# Altium PCB PWM_Controller.PcbDoc
Units mil, origin at the board's own origin, x right, y up, seen from the top; angles counter-clockwise.
Board outline 3475 x 3100 mil, 2 copper layers (Top Layer, Bottom Layer); 119 components, 77 nets, 390 pads, 78 vias.
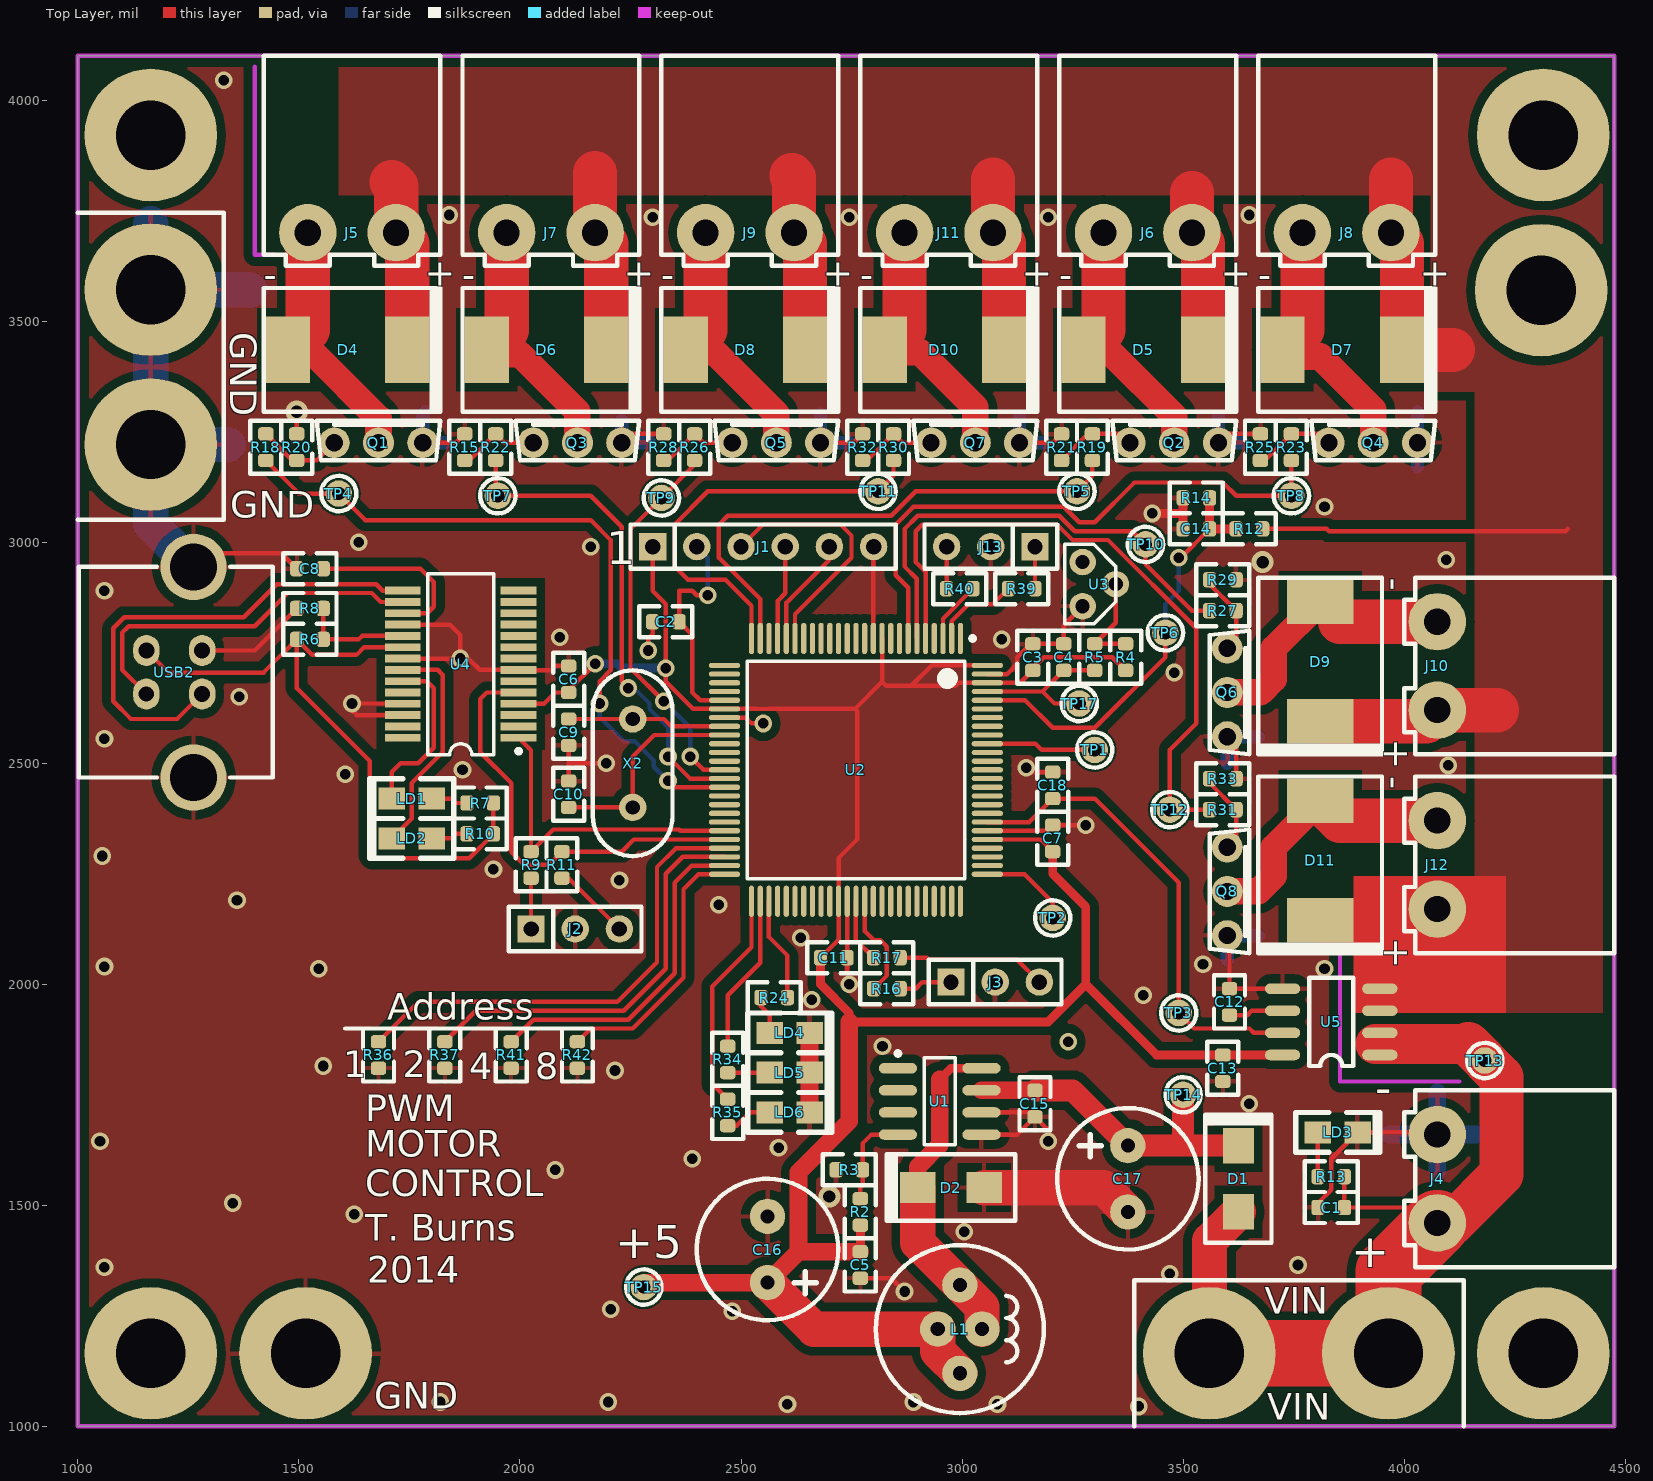
[diagram p0: Top Layer view]
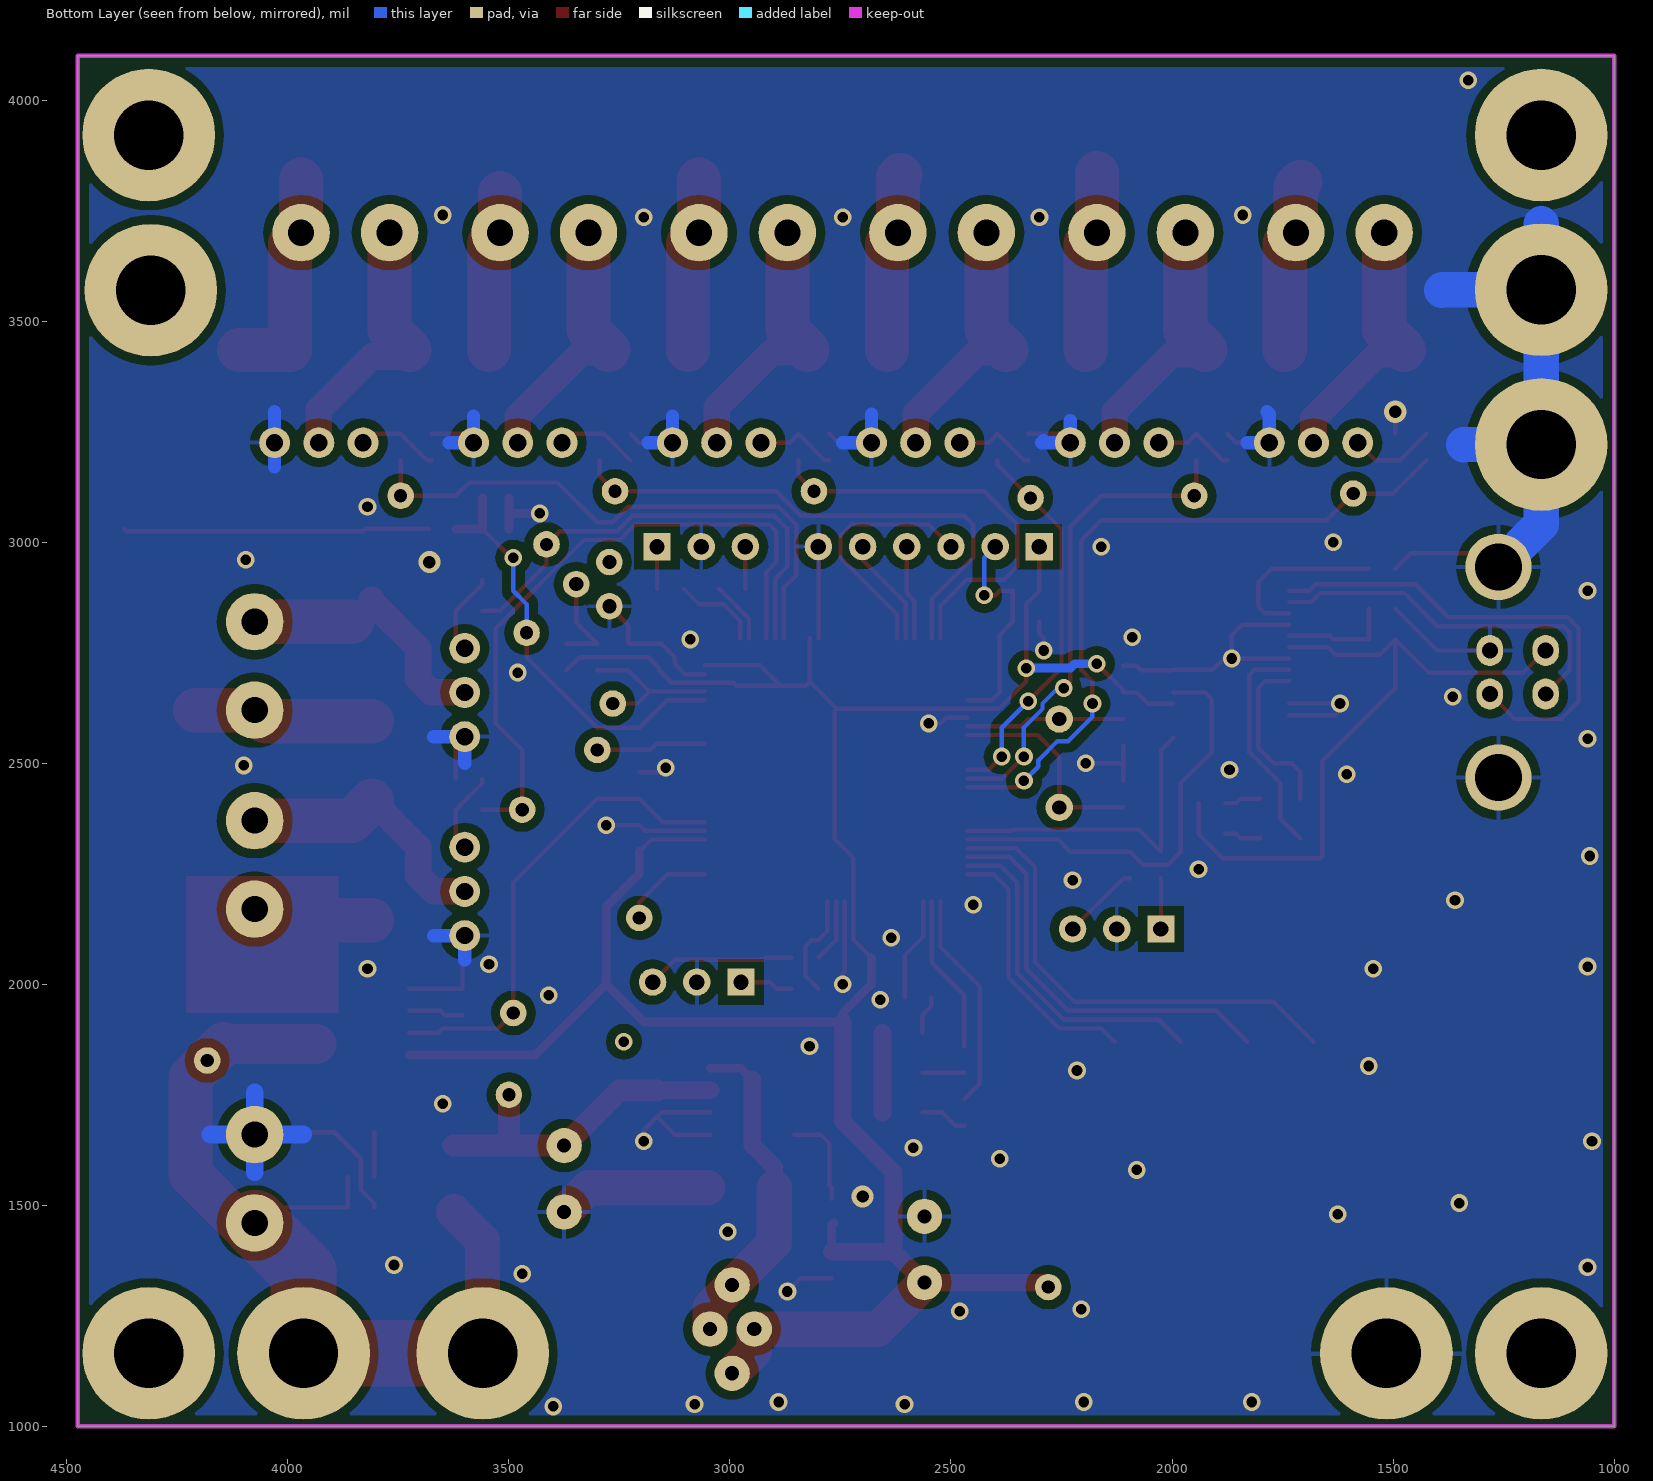
[diagram p1: Bottom Layer view, seen from below]

## Layer stack, top to bottom
Top Layer: signal copper 1.4
Dielectric: dielectric 12.6, FR-4, Dk 4.8
Bottom Layer: signal copper 1.4

## Board outline
1000,1000 1000,4100 4475,4100 4475,1000

## Design rules (kind name [scope] priority, off if disabled: settings)
Clearance Clearance_poly [InPoly] p1: gap=20
Clearance [All] p2: gap=7
ComponentClearance [All] p1 off: gap=10 collisioncheckmode=3 verticalgap=10 showdistances=FALSE
HoleSize [All] p1: absolutevalues=TRUE maxlimit=400 minlimit=24 maxpercent=80.000 minpercent=20.000
MinimumAnnularRing [All] p1: minimumring=8
PlaneClearance [All] p1: clearance=12
PolygonConnect PolygonConnect_via [IsVia] p1: connectstyle=Direct reliefconductorwidth=10 reliefentries=4 polygonreliefangle="90 Angle"
PolygonConnect [All] p2: connectstyle=Relief reliefconductorwidth=10 reliefentries=4 polygonreliefangle="90 Angle"
RoutingVias [All] p1: holewidth=24 width=40 viastyle="Through Hole" minholewidth=24 minwidth=35 maxholewidth=28 maxwidth=50
SolderMaskExpansion [All] p1: expansion=4
TestPointUsage [All] p1: valid=0 allowmultiple=FALSE
Testpoint [(IsPad And (OnTopLayer Or OnBottomLayer))] p1: side=3 testpointundercomponent=TRUE minsize=40 maxsize=100 preferedsize=60 minholesize=0 maxholesize=40 preferedholesize=32 testpointgrid=1 style=297 order=0123456789
Width [All] p1: maxlimit=300 minlimit=10 preferedwidth=10
16 further rules are at their usual default settings.

## Components (designator, comment, footprint, x,y, rotation, side; value= is the part's Value field where it differs from the comment)
C1 "100n" 0603 3805,1495 r0 top
C2 "100n" 0603 2300,2820 r0 top
C3 "100n" 0603 3160,2770 r270 top
C4 "100n" 0603 3230,2770 r270 top
C5 "100n" 0603 2770,1395 r270 top
C6 "100n" 0603 2110,2720 r270 top
C7 "100n" 0603 3205,2360 r270 top
C8 "100n" 0603 1495,2940 r0 top
C9 "22p" 0603 2110,2600 r270 top
C10 "22p" 0603 2110,2400 r90 top
C11 "100n" 0603 2740,2060 r180 top
C12 "100n" 0603 3605,1990 r270 top
C13 "100n" 0603 3590,1780 r90 top
C14 "100n" 0603 3500,3030 r0 top
C15 "100n" 0603 3165,1700 r90 top
C16 "220u 25V" RB.15/.32 2560,1325 r180 top
C17 "220u 25V" RB.15/.32 3375,1635 r0 top
C18 "100n" 0603 3205,2480 r270 top
D1 "SS14" DO-214AC 3625,1560 r270 top
D2 "SS14" DO-214AC 2975,1540 r0 top
D4 "SK54C" SMC 1610,3435 r180 top
D5 "SK54C" SMC 3410,3435 r180 top
D6 "SK54C" SMC 2060,3435 r180 top
D7 "SK54C" SMC 3860,3435 r180 top
D8 "SK54C" SMC 2510,3435 r180 top
D9 "SK54C" SMC 3810,2730 r90 top
D10 "SK54C" SMC 2960,3435 r180 top
D11 "SK54C" SMC 3810,2280 r90 top
J1 "Pins 6" SIP6 2300,2990 r0 top
J2 "PINS3" SIP3 2025,2125 r0 top
J3 "PINS3" SIP3 2975,2005 r0 top
J4 "Dinkle Horizontal Socket" WEID2R 4075,1460 r90 top
J5 "Dinkle Horizontal Socket" WEID2R 1720,3700 r180 top
J6 "Dinkle Horizontal Socket" WEID2R 3520,3700 r180 top
J7 "Dinkle Horizontal Socket" WEID2R 2170,3700 r180 top
J8 "Dinkle Horizontal Socket" WEID2R 3970,3700 r180 top
J9 "Dinkle Horizontal Socket" WEID2R 2620,3700 r180 top
J10 "Dinkle Horizontal Socket" WEID2R 4075,2620 r90 top
J11 "Dinkle Horizontal Socket" WEID2R 3070,3700 r180 top
J12 "Dinkle Horizontal Socket" WEID2R 4075,2170 r90 top
J13 "PINS3" SIP3 3165,2990 r180 top
L1 "100uH" INDUCTOR6B 2995,1220 r0 top
LD1 "RED" 0805DIODE 1710,2420 r0 top
LD2 "YEL" 0805DIODE 1710,2330 r0 top
LD3 "RED" 0805DIODE 3895,1665 r180 top
LD4 "RED" 0805DIODE 2655,1890 r180 top
LD5 "RED" 0805DIODE 2655,1800 r180 top
LD6 "RED" 0805DIODE 2655,1710 r180 top
Q1 "IRLU024NPBF" TO-251 1780,3225 r0 top
Q2 "IRLU024NPBF" TO-251 3580,3225 r0 top
Q3 "IRLU024NPBF" TO-251 2230,3225 r0 top
Q4 "IRLU024NPBF" TO-251 4030,3225 r0 top
Q5 "IRLU024NPBF" TO-251 2680,3225 r0 top
Q6 "IRLU024NPBF" TO-251 3600,2560 r270 top
Q7 "IRLU024NPBF" TO-251 3130,3225 r0 top
Q8 "IRLU024NPBF" TO-251 3600,2110 r270 top
R2 "4k7" 0603 2770,1455 r90 top
R3 "1k5" 0603 2775,1580 r180 top
R4 "1k8" 0603 3370,2710 r90 top
R5 "10k" 0603 3300,2770 r270 top
R6 "4k7" 0603 1495,2780 r0 top
R7 "330R" 0603 1940,2410 r180 top
R8 "10k" 0603 1495,2850 r0 top
R9 "330R" 0603 2025,2240 r90 top
R10 "330R" 0603 1940,2340 r180 top
R11 "330R" 0603 2095,2240 r90 top
R12 "3k" 0603 3620,3030 r0 top
R13 "1k8" 0603 3865,1565 r180 top
R14 "1k" 0603 3560,3100 r180 top
R15 "10k" 0603 1875,3245 r270 top
R16 "330R" 0603 2800,1990 r0 top
R17 "330R" 0603 2800,2060 r0 top
R18 "1k" 0603 1425,3185 r90 top
R19 "1k" 0603 3295,3185 r90 top
R20 "10k" 0603 1495,3245 r270 top
R21 "10k" 0603 3225,3245 r270 top
R22 "1k" 0603 1945,3185 r90 top
R23 "1k" 0603 3745,3185 r90 top
R24 "330R" 0603 2605,1970 r180 top
R25 "10k" 0603 3675,3245 r270 top
R26 "1k" 0603 2395,3185 r90 top
R27 "1k" 0603 3560,2845 r0 top
R28 "10k" 0603 2325,3245 r270 top
R29 "10k" 0603 3620,2915 r180 top
R30 "1k" 0603 2845,3185 r90 top
R31 "1k" 0603 3560,2395 r0 top
R32 "10k" 0603 2775,3245 r270 top
R33 "10k" 0603 3620,2465 r180 top
R34 "330R" 0603 2470,1860 r270 top
R35 "330R" 0603 2470,1740 r270 top
R36 "10k" 0603 1680,1810 r90 top
R37 "10k" 0603 1830,1810 r90 top
R39 "330R" 0603 3165,2895 r180 top
R40 "330R" 0603 2965,2895 r0 top
R41 "10k" 0603 1980,1810 r90 top
R42 "10k" 0603 2130,1810 r90 top
TP1 "TEST POINT" "TEST POINT" 3300,2530 r0 top
TP2 "TEST POINT" "TEST POINT" 3205,2150 r0 top
TP3 "TEST POINT" "TEST POINT" 3490,1935 r0 top
TP4 "TEST POINT" "TEST POINT" 1590,3110 r0 top
TP5 "TEST POINT" "TEST POINT" 3260,3115 r0 top
TP6 "TEST POINT" "TEST POINT" 3460,2795 r0 top
TP7 "TEST POINT" "TEST POINT" 1950,3105 r0 top
TP8 "TEST POINT" "TEST POINT" 3745,3105 r0 top
TP9 "TEST POINT" "TEST POINT" 2320,3100 r0 top
TP10 "TEST POINT" "TEST POINT" 3415,2995 r90 top
TP11 "TEST POINT" "TEST POINT" 2810,3115 r90 top
TP12 "TEST POINT" "TEST POINT" 3470,2395 r90 top
TP13 "TEST POINT" "TEST POINT" 4182.5,1827.5 r90 top
TP14 "TEST POINT" "TEST POINT" 3500,1750 r90 top
TP15 "TEST POINT" "TEST POINT" 2280,1315 r90 top
TP17 "TEST POINT" "TEST POINT" 3265,2635 r90 top
U1 "LM2594M-ADJ" M08A_N 2855,1810 r0 top
U2 "ATMEGA2560-16AU" 100T1_N 2760,2485 r270 top
U3 "LM335Z" TO-92_LM335 3272.71,2855 r90 top
U4 "FT232R" ssop28 1865.91,2723.98 r90 top
U5 "Current Sensor" so-8 3945,1840 r180 top
USB2 "USB-B" USB_BV 1155,2755 r90 top
X2 "14.7456MHz" XTAL-V2 2255,2400 r90 top

## Footprints (in the part's own frame and the unit in brackets; to place one, negate y for a bottom-side part, rotate by r counter-clockwise, add the part's x,y. Pads: shape width x height; smd on the part's side, far side on the other; paste and mask are expansions set on the pad)
100T1_N [mm] "100-Pin Thin Quad Flat Pack 0.5 mm Pitch, IPC Medium Density"
  oval 1.8x0.3 smd: 1(-7.55,6) 2(-7.55,5.5) 3(-7.55,5) 4(-7.55,4.5) 5(-7.55,4) 6(-7.55,3.5) 7(-7.55,3) 8(-7.55,2.5) 9(-7.55,2) 10(-7.55,1.5) 11(-7.55,1) 12(-7.55,0.5) 13(-7.55,0) 14(-7.55,-0.5) 15(-7.55,-1) 16(-7.55,-1.5) 17(-7.55,-2) 18(-7.55,-2.5) 19(-7.55,-3) 20(-7.55,-3.5) 21(-7.55,-4) 22(-7.55,-4.5) 23(-7.55,-5) 24(-7.55,-5.5) 25(-7.55,-6) 51(7.55,-6) 52(7.55,-5.5) 53(7.55,-5) 54(7.55,-4.5) 55(7.55,-4) 56(7.55,-3.5) 57(7.55,-3) 58(7.55,-2.5) 59(7.55,-2) 60(7.55,-1.5) 61(7.55,-1) 62(7.55,-0.5) 63(7.55,0) 64(7.55,0.5) 65(7.55,1) 66(7.55,1.5) 67(7.55,2) 68(7.55,2.5) 69(7.55,3) 70(7.55,3.5) 71(7.55,4) 72(7.55,4.5) 73(7.55,5) 74(7.55,5.5) 75(7.55,6)
  oval 0.3x1.8 smd: 26(-6,-7.55) 27(-5.5,-7.55) 28(-5,-7.55) 29(-4.5,-7.55) 30(-4,-7.55) 31(-3.5,-7.55) 32(-3,-7.55) 33(-2.5,-7.55) 34(-2,-7.55) 35(-1.5,-7.55) 36(-1,-7.55) 37(-0.5,-7.55) 38(0,-7.55) 39(0.5,-7.55) 40(1,-7.55) 41(1.5,-7.55) 42(2,-7.55) 43(2.5,-7.55) 44(3,-7.55) 45(3.5,-7.55) 46(4,-7.55) 47(4.5,-7.55) 48(5,-7.55) 49(5.5,-7.55) 50(6,-7.55) 76(6,7.55) 77(5.5,7.55) 78(5,7.55) 79(4.5,7.55) 80(4,7.55) 81(3.5,7.55) 82(3,7.55) 83(2.5,7.55) 84(2,7.55) 85(1.5,7.55) 86(1,7.55) 87(0.5,7.55) 88(0,7.55) 89(-0.5,7.55) 90(-1,7.55) 91(-1.5,7.55) 92(-2,7.55) 93(-2.5,7.55) 94(-3,7.55) 95(-3.5,7.55) 96(-4,7.55) 97(-4.5,7.55) 98(-5,7.55) 99(-5.5,7.55) 100(-6,7.55)
  silkscreen extent -7.67,-6.25 6.25,6.83, body extent -7,-7 7,7, height 1.05
0603 [mil]
  rrect50% 30x35 smd: 1(0,0) 2(60,0)
  silkscreen extent -30,-35 90,35
0805DIODE [mil]
  rect 60x50 smd: A(90,0) K(0,0)
  silkscreen extent -50,-45 140,45
DO-214AC [mil]
  rect 80x70 smd: A(75,0) K(-75,0)
  silkscreen extent -145,-75 145,75
INDUCTOR6B [mil] "380mil dia"
  round 80 hole 32: 1(0,100) 1(50,0) 2(-50,0) 2(0,-100)
  silkscreen extent -190,-190 190,190
M08A_N [mm]
  oval 2.2x0.6 smd: 1(0,0) 2(0,-1.27) 3(0,-2.54) 4(0,-3.81) 5(4.8,-3.81) 6(4.8,-2.54) 7(4.8,-1.27) 8(4.8,0)
  silkscreen extent -0.12,-4.41 3.3,0.97, body extent 0.45,-4.36 4.35,0.54, height 1.76
RB.15/.32 [mil]
  round 80 hole 32: 1(0,0) 2(0,-150)
  silkscreen extent -160,-235 160,85
SIP3 [mil]
  rect 62x62 hole 35: 1(0,0)
  round 62 hole 35: 2(100,0) 3(200,0)
  silkscreen extent -50,-50 250,50
SIP6 [mil]
  rect 62x62 hole 35: 1(0,0)
  round 62 hole 35: 2(100,0) 3(200,0) 4(300,0) 5(400,0) 6(500,0)
  silkscreen extent -50,-50 550,50
SMC [mil]
  rect 100x150 smd: A(135,0) K(-135,0)
  silkscreen extent -210,-140 190,140
so-8 [mil]
  oval 80x24 smd: 1(0,0) 2(0,-50) 3(0,-100) 4(0,-150) 5(220,-150) 6(220,-100) 7(220,-50) 8(220,0)
  silkscreen extent 60,-175 160,25
ssop28 [mm] "SSOP; 28 Leads; Body Width 5.3 mm; Pitch 0.65 mm"
  rect 0.45x2.05 smd: 1(-4.225,-3.325) 2(-3.575,-3.325) 3(-2.925,-3.325) 4(-2.275,-3.325) 5(-1.625,-3.325) 6(-0.975,-3.325) 7(-0.325,-3.325) 8(0.325,-3.325) 9(0.975,-3.325) 10(1.625,-3.325) 11(2.275,-3.325) 12(2.925,-3.325) 13(3.575,-3.325) 14(4.225,-3.325) 15(4.225,3.325) 16(3.575,3.325) 17(2.925,3.325) 18(2.275,3.325) 19(1.625,3.325) 20(0.975,3.325) 21(0.325,3.325) 22(-0.325,3.325) 23(-0.975,3.325) 24(-1.625,3.325) 25(-2.275,3.325) 26(-2.925,3.325) 27(-3.575,3.325) 28(-4.225,3.325)
  silkscreen extent -5.2,-3.45 5.2,1.9
"TEST POINT" [mil]
  round 60 hole 30: 1(0,0)
  silkscreen extent -40,-40 40,40
TO-92_LM335 [mil]
  round 60 hole 32: +(50,-75) -(0,0) ADJ(100,0)
  silkscreen extent -40,-75 140,40
TO-251 [mil]
  round 70 hole 39: D(-100,0) G(-200,0) S(0,0)
  silkscreen extent -240,-40 40,50
USB_BV [mm] "USB Type B vertical"
  round 3.81 hole 2.71: 0(-7.3,-2.71) 0(4.8,-2.71)
  oval 1.778x1.524 hole 0.92: 1(0,0) 3(-2.5,-3.2) 4(0,-3.2)
  oval 1.778x1.524 hole 0.889: 2(-2.5,0)
  silkscreen extent -7.3,-7.26 4.82,3.89
WEID2R [mil]
  round 130 hole 59: 1(0,0) 2(200,0)
  silkscreen extent -100,-400 300,75
XTAL-V2 [mil]
  round 62 hole 32: 1(0,0) 2(200,0)
  silkscreen extent -110,-90 310,90

## Part data
C1 C3 C4 C6 C7 C8 C9 C10 C11 C12 C13 C14 C15 C18: library part CAP
C2 C5: library part cap
C16 C17: library part "CAPACITOR POL-S"
D1 D2: library part "DIODE SCHOTTKY-S", "SCHOTTKY , 1A, 40V"
D4 D5 D6 D7 D8 D9 D10 D11: library part "DIODE SCHOTTKY"
J1: library part CON6
J2 J3 J13: library part CON3
J4 J5 J6 J7 J8 J9 J10 J11 J12: library part CON2
L1: library part INDUCTOR6
LD1 LD2 LD3 LD4 LD5 LD6: library part LED
Q1 Q2 Q3 Q4 Q5 Q6 Q7 Q8: library part MOSFET-N1DSML, "N Channel MOSFET"
R2 R3: library part RES-AX0.3
R4 R5 R6 R7 R8 R10 R12 R13 R14 R15 R22 R23 R24 R25 R26 R27 R28 R29 R30 R31 R32 R33 R34 R35 R36 R37 R41 R42: library part RES8
R9 R11 R16 R17 R39 R40: library part res8
R18 R19 R20 R21: library part RES8, "1% Resistor"
TP1 TP2 TP3 TP4 TP5 TP6 TP7 TP8 TP9 TP10 TP11 TP12 TP13 TP14 TP15 TP17: "Probe compatible test point"
U1: library part LM2594, "SMPS 0.5A"
U2: library part ATMEGA2560(TQFP100)
U5: library part ACS714, "+/- XA Current Sensor"
X2: library part CRYSTAL

## Free pads (board coordinates)
  round 300 hole 157 paste+0: ""(1165,1165) ""(1165,3220.91) ""(1165,3570.91) ""(1165,3920.91) ""(1515,1165) ""(3559.61,1165) ""(3964.61,1165) ""(4310,3570) ""(4314.61,1165) ""(4314.61,3920.91)

## Via types
v1: diameter 40, hole 24, Top Layer to Bottom Layer, tented both sides, 75 vias
v2: diameter 50, hole 28, Top Layer to Bottom Layer, 3 vias

## Nets (pads, with @x,y where several pads share a name; then routed paths per layer and width w, separated by ;. In a path a pad name is that pad's centre, name@x,y a point inside that pad or via, vN(x,y) a via of type N, cw(c..) or ccw(c..) an arc to the next point about the centre after c; other vN are vias at no path point)
12V: C1.2 D1.A J4.1 pad.@3559.61,1165 pad.@3964.61,1165 R13.1 TP13.1 U5.1 U5.2 | length 2113.9
  Top Layer w10: R13.1 C1.2 4040,1495 J4.1
  Top Layer w80: pad.@3559.61,1165 3559.61,1419.61 D1.A ; J4.1 J4.1@4110,1460
  Top Layer w90: 3935,1865 4145,1865
  Top Layer w100: J4.1@4110,1460 4220,1570 4220,1790 4145,1865
  Top Layer w150: pad.@3559.61,1165 3964.61,1165 3964.61,1349.61 J4.1
+5: C3.2 C5.1 C6.2 C7.2 C11.2 C13.2 C16.1 J1.1 L1.2 R2.1 R4.1 TP15.1 U2.10 U2.31 U2.61 U2.80 U2.98 U2.100 U4.4 U5.8 | length 6171.6
  Top Layer w10: U4.4 2054.41,2634.41 2080,2660 C6.2 2110,2665 v1(2170,2725) ; J1.1 2300,2890 2330,2860 v1(2330,2715) 2330,2685 2392.2,2622.8 U2.31 2757.8,2622.8 ; C11.2 2720.63,2100.63 U2.61 2720.63,2285.63 2762.52,2327.52 2762.52,2618.07 2757.8,2622.8 ; U2.10 2819.06,2684.06 ; U2.80 3177.48,2327.52 C7.2 ; U2.100 2931.22,2721.22 2885,2675 ; R4.1 3340,2740 3185,2740 3160,2715 C3.2 3131.85,2681.85 U2.98 2991.85,2681.85 2985,2675 2885,2675 ; 2757.8,2622.8 2819.06,2684.06 ; 2819.06,2684.06 2828.11,2675 2885,2675
  Top Layer w20: C11.2 2680,2000 2745,1935 2745,1915 3195,1915 3280,2000 ; R2.1@2765,1460 R2.1 C5.1 ; C7.2 3205,2250 3280,2175 3280,2000 ; U5.8 C13.2 3440,1840 3280,2000
  Top Layer w40: TP15.1 2290,1325 C16.1 2630,1395 ; 2745,1915 2745,1690 2630,1575 2630,1395 ; C5.1 2630,1395
  Top Layer w80: C16.1 2665,1220 2945,1220 2945,1170 L1.2@2995,1120
  Bottom Layer w20: v1(2170,2725) 2220,2725 2230,2715 v1(2330,2715)
ADDR_0: R36.2 U2.47 | length 1090.1
  Top Layer w10: R36.2 1770,1960 2220,1960 2310,2050 2310,2265 2352.83,2307.83 U2.47
ADDR_1: R37.2 U2.48 | length 931.9
  Top Layer w10: R37.2 1900,1940 2235,1940 2330,2035 2330,2250 2368.15,2288.15 U2.48
ADDR_2: R41.2 U2.49 | length 767.9
  Top Layer w10: R41.2 2030,1920 2245,1920 2350,2025 2350,2230 2388.46,2268.46 U2.49
ADDR_3: R42.2 U2.50 | length 606.8
  Top Layer w10: R42.2 2160,1900 2255,1900 2370,2015 2370,2215 2403.78,2248.78 U2.50
CS0: U2.19
GND: C1.1 C2.1 C3.1 C4.1 C5.2 C6.1 C7.1 C8.1 C9.2 C10.2 C11.1 C12.1 C13.1 C14.1 C15.1 C16.2 C17.2 C18.1 D2.A J1.6 J2.2 J3.2 J4.2 J13.2 LD3.K LD4.K LD5.K LD6.K pad.@1165,3220.91 pad.@1165,3570.91 pad.@1515,1165 Q1.S Q2.S Q3.S Q4.S Q5.S Q6.S Q7.S Q8.S R3.2 R8.1 R14.2 R15.1 R20.1 R21.1 R25.1 R28.1 R29.1 R32.1 R33.1 R36.1 R37.1 R41.1 R42.1 U1.5 U1.6 U2.11 U2.32 U2.62 U2.81 U2.99 U3.- U4.7 U4.18 U4.21 U4.25 U4.26 U5.5 USB2.0 USB2.4 | length 7699.2
  Top Layer w10: USB2.0@1261.69,2943.98 1292.72,2975 1460,2975 C8.1 ; USB2.4 1400,2755 R8.1 ; R20.1 v2(1495,3295) ; U4.26 1631.18,2608.82 1620,2620 v1(1620,2635) 1734.41,2635 U4.25 ; U4.21 v1(1865,2736.77) ; U4.18 1841.46,2813.54 1865,2790 v1(1865,2736.77) ; Q1.S 1855,3225 R15.1 ; C10.2 2110,2500 ; C9.2 2110,2500 ; C6.1 2080,2720 2070,2710 1997.99,2710 U4.7 1908.82,2711.18 1883.23,2736.77 v1(1865,2736.77) ; J2.2 J2.2@2130,2125 ; v1(2195,2500) 2110,2500 ; Q3.S 2250,3245 R28.1 ; v1(2290,2755) 2290,2782.5 2300,2792.5 C2.1 ; U2.32 2510.83,2603.11 2523.94,2590 v1(2550,2590) ; Q5.S 2755,3225 R32.1 ; U2.62 2740,2187.44 C11.1 2740,2030 2745,2025 v1(2745,2000) ; C5.2 2840,1335 v1(2870,1305) ; U2.11 2799.37,2989.37 J1.6 ; U1.5 3125,1660 C15.1 ; U1.6 3155,1710 C15.1 ; U2.81 3192.2,2347.2 C7.1 v1(3280,2360) ; U2.99 3101.54,2701.54 3125,2725 3125,2740 3155,2770 C3.1 C4.1 3230,2812.29 U3.- ; Q7.S 3205,3225 R21.1 ; v1@3140,2490 v1(3145,2490) 3155,2480 C18.1 ; v1(3195,1645) 3195,1670 C15.1 ; Q2.S 3600,3245 R25.1 ; Q8.S 3605,2105 C12.1 U5.5 ; Q6.S 3620,2540 R33.1 ; C1.1 3805,1505 3835,1535 3835,1605 LD3.K 4070,1665 J4.2
  Top Layer w20: v1(3430,3065) 3500,3065 ; C14.1 3500,3065 ; R14.2 3500,3065
  Top Layer w40: LD6.K LD5.K LD4.K
  Top Layer w80: D2.A 3320,1540 C17.2
  Bottom Layer w10: 2230,3275 2230,3285
  Bottom Layer w30: 1785,3295 1780,3290 Q1.S 1830,3225 ; 2230,3275 Q3.S 2295,3225 2290,3230 ; 2680,3290 Q5.S 2745,3225 ; 3130,3285 Q7.S 3185,3225 ; 3580,3285 Q2.S 3635,3225 ; 3600,2055 Q8.S 3670,2110 ; 3600,2500 Q6.S 3670,2560 ; 4030,3170 Q4.S 4030,3295
  Bottom Layer w40: 3965,1660 J4.2 ; 4075,1575 J4.2 ; 4075,1755 J4.2 ; 4175,1660 J4.2
  Bottom Layer w80: pad.@1165,3720 pad.@1165,3570.91 ; USB2.0@1261.69,2943.98 1165,3040.67 pad.@1165,3220.91 ; 1340,3220 1339.09,3220.91 pad.@1165,3220.91 ; 1390,3570 1389.09,3570.91 pad.@1165,3570.91 ; pad.@1165,3220.91 pad.@1165,3570.91
  other v1: 3400,1045 2605,1050 3080,1050 1820,1055 2200,1055 2890,1055 2480,1260 2205,1265 3470,1345 1060,1360 3760,1365 3005,1440 1625,1480 1350,1505 2080,1580 2390,1605 2585,1630 1050,1645 3650,1730 2215,1805 1555,1815 2820,1860 2660,1965 3410,1975 1545,2035 3820,2035 1060,2040 3545,2045 2635,2105 2450,2180 1360,2190 2225,2235 1940,2260 1055,2290 1605,2475 1870,2485 4100,2495 1060,2555 1365,2650 3480,2705 3090,2780 2090,2785 1060,2890 4095,2960 2160,2990 1635,3000 3820,3080 2300,3735 2745,3735 3195,3735 1840,3740 3650,3740 1330,4045
  other v2: 2700,1520 3680,2955
MISO: J1.4 U2.22 | length 214.9
  Top Layer w10: U2.22 2582.83,2867.17 2600,2884.33 J1.4
MOSI: J1.5 U2.21 | length 248.1
  Top Layer w10: U2.21 2602.52,2862.52 2700,2960 J1.5
MOTORCURRENT: C18.2 TP3.1 U2.82 U5.7 | length 1082.1
  Top Layer w10: U2.82 3151.89,2366.89 C18.2 3300,2420 3490,2230 TP3.1 3525,1900 3650,1900 3660,1890 U5.7
MOTORRAIL: D4.K D5.K D6.K D7.K D8.K D9.K D10.K D11.K J5.1 J6.1 J7.1 J8.1 J9.1 J10.1 J11.1 J12.1 R12.2 U5.3 U5.4 | length 3827.8
  Top Layer w10: R12.2 3825,3030 3830,3025 4365,3025 4370,3030
  Top Layer w100: 1710,3815 1720,3805 J5.1 1745,3675 D4.K ; 2170,3835 J7.1 2195,3675 D6.K ; 2615,3830 2620,3825 J9.1 2645,3675 D8.K ; 3070,3820 J11.1 3095,3675 D10.K ; 3520,3790 J6.1 3545,3675 D5.K ; D11.K J12.1@4050,2145 ; D9.K 4050,2595 J10.1 4210,2620 ; 3970,3820 J8.1 3995,3675 D7.K 4110,3435
MOTORRAIL_ADC: C14.2 R12.1 R14.1 TP6.1 U2.96 | length 959.3
  Top Layer w10: U2.96 3142.52,2642.48 3205,2580 3300,2580 3460,2740 TP6.1 ; v1(3490,2965) 3495,2965 C14.2
  Top Layer w20: R14.1 C14.2 R12.1
  Bottom Layer w10: TP6.1 3460,2860 3490,2890 v1(3490,2965)
NetC8_2: C8.2 U4.17 | length 394.6
  Top Layer w10: C8.2 1775,2940 1805,2910 1805,2853.9 1790.24,2839.13 U4.17
NetC9_1: C9.1 U2.33 X2.2 | length 359.6
  Top Layer w10: C9.1 X2.2 2325,2600 2341.57,2583.43 U2.33
NetC10_1: C10.1 U2.34 X2.1 | length 487.9
  Top Layer w10: C10.1 X2.1 2255,2515 2303.74,2563.74 U2.34
NetC12_2: C12.2 U5.6 | length 124.1
  Top Layer w10: C12.2 3645,1930 3655,1940 U5.6
NetC15_2: C15.2 C17.1 D1.K TP14.1 U1.7 | length 747.8
  Top Layer w40: U1.7 C15.2
  Top Layer w50: C15.2 3250,1760 C17.1 3500,1635 ; TP14.1 3500,1635 ; D1.K 3500,1635
NetD2_K: D2.K L1.1 U1.8 | length 750.1
  Top Layer w20: 2949.91,1784.91 2975,1810 U1.8
  Top Layer w40: D2.K 2900,1586.66 2949.91,1636.57 2949.91,1784.91
  Top Layer w80: D2.K 2900,1415 2995,1320 3045,1270 L1.1@3045,1220
NetD4_A: D4.A J5.2 Q1.D | length 622.8
  Top Layer w60: D4.A@1475,3425 D4.A@1485,3425 ; D4.A D4.A@1485,3425 ; D4.A@1485,3425 1535,3425 1680,3280 Q1.D@1680,3230 ; Q1.D@1680,3230 Q1.D Q1.D@1680,3230
  Top Layer w100: D4.A 1520,3480 J5.2
NetD5_A: D5.A J6.2 Q2.D | length 620.8
  Top Layer w60: D5.A@3275,3430 D5.A@3280,3430 ; D5.A D5.A@3280,3430 ; D5.A@3280,3430 3335,3430 3480,3285 Q2.D@3480,3230 ; Q2.D@3480,3230 Q2.D Q2.D@3480,3230
  Top Layer w100: D5.A 3320,3480 J6.2
NetD6_A: D6.A J7.2 Q3.D | length 631.6
  Top Layer w60: D6.A@1925,3425 D6.A@1935,3425 ; D6.A D6.A@1935,3425 ; D6.A@1935,3425 2000,3425 2130,3295 Q3.D@2130,3230 ; Q3.D@2130,3230 Q3.D Q3.D@2130,3230
  Top Layer w100: D6.A 1970,3480 J7.2
NetD7_A: D7.A J8.2 Q4.D | length 639.6
  Top Layer w60: D7.A@3725,3420 D7.A@3740,3420 ; D7.A D7.A@3740,3420 ; D7.A@3740,3420 3810,3420 3930,3300 Q4.D@3930,3230 ; Q4.D@3930,3230 Q4.D Q4.D@3930,3230
  Top Layer w100: D7.A 3770,3480 J8.2
NetD8_A: D8.A J9.2 Q5.D | length 623.7
  Top Layer w60: D8.A@2375,3430 D8.A@2380,3430 ; D8.A D8.A@2380,3430 ; D8.A@2380,3430 2440,3430 2580,3290 Q5.D@2580,3230 ; Q5.D@2580,3230 Q5.D Q5.D@2580,3230
  Top Layer w100: D8.A 2420,3480 J9.2
NetD9_A: D9.A J10.2 Q6.D | length 565.9
  Top Layer w60: D9.A@3810,2870 D9.A 3705,2760 3705,2690 3675,2660 Q6.D@3605,2660 ; Q6.D@3605,2660 Q6.D Q6.D@3605,2660
  Top Layer w100: D9.A@3855,2820 J10.2
NetD10_A: D10.A J11.2 Q7.D | length 627.5
  Top Layer w60: D10.A@2825,3425 2830,3430 2905,3430 3030,3305 Q7.D@3030,3230 ; Q7.D@3030,3230 Q7.D Q7.D@3030,3230
  Top Layer w100: D10.A 2870,3480 J11.2
NetD11_A: D11.A J12.2 Q8.D | length 621.6
  Top Layer w60: D11.A 3705,2310 3705,2245 3670,2210 Q8.D@3605,2210 ; Q8.D@3605,2210 Q8.D Q8.D@3605,2210
  Top Layer w100: D11.A 3855,2370 J12.2
NetJ2_1: J2.1 R9.1 | length 115
  Top Layer w10: J2.1 R9.1
NetJ2_3: J2.3 R11.1 | length 177.6
  Top Layer w10: R11.1 2110,2240 J2.3
NetJ3_1: J3.1 R16.2 | length 121.2
  Top Layer w10: R16.2 2895,1990 2910,2005 J3.1
NetJ3_3: J3.3 R17.2 | length 337.8
  Top Layer w10: R17.2 2920,2060 2925,2055 3125,2055 J3.3
NetJ13_1: J13.1 R39.1 | length 95
  Top Layer w10: R39.1 J13.1
NetJ13_3: J13.3 R40.1 | length 95
  Top Layer w10: R40.1 J13.3
NetLD1_A: LD1.A R7.2 | length 84.1
  Top Layer w10: LD1.A 1845,2420 1855,2410 R7.2
NetLD2_A: LD2.A R10.2 | length 84.1
  Top Layer w10: LD2.A 1845,2330 1855,2340 R10.2
NetLD3_A: LD3.A R13.2 | length 100
  Top Layer w10: R13.2 LD3.A
NetLD4_A: LD4.A R24.2 | length 88.3
  Top Layer w10: R24.2 2545,1950 2565,1930 LD4.A
NetLD5_A: LD5.A R34.2 | length 95
  Top Layer w10: R34.2 LD5.A
NetLD6_A: LD6.A R35.2 | length 107.4
  Top Layer w10: R35.2 2490,1680 2520,1710 LD6.A
NetQ1_G: Q1.G R18.2 R20.2 | length 196.4
  Top Layer w10: R18.2 1485,3185 R20.2 1540,3185 Q1.G
NetQ2_G: Q2.G R19.2 R21.2 | length 188.1
  Top Layer w10: R21.2 3285,3245 R19.2 3360,3245 Q2.G
NetQ3_G: Q3.G R15.2 R22.2 | length 188.1
  Top Layer w10: R15.2 1885,3185 R22.2 1965,3225 Q3.G
NetQ4_G: Q4.G R23.2 R25.2 | length 188.1
  Top Layer w10: R25.2 3685,3185 R23.2 3810,3245 Q4.G
NetQ5_G: Q5.G R26.2 R28.2 | length 188.1
  Top Layer w10: R28.2 2335,3185 R26.2 2415,3225 Q5.G
NetQ6_G: Q6.G R27.2 R29.2 | length 188.1
  Top Layer w10: R29.2 3560,2905 R27.2 3620,2780 Q6.G
NetQ7_G: Q7.G R30.2 R32.2 | length 188.1
  Top Layer w10: R32.2 2785,3185 R30.2 2865,3225 Q7.G
NetQ8_G: Q8.G R31.2 R33.2 | length 188.1
  Top Layer w10: R33.2 3560,2455 R31.2 3620,2330 Q8.G
NetR2_2: R2.2 R3.1 U1.4 | length 215.4
  Top Layer w10: R2.2 2770,1540 2775,1545 R3.1 2775,1640 2795,1660 U1.4
NetR4_2: R4.2 R5.1 U3.+ | length 224.8
  Top Layer w10: U3.+ 3347.71,2817.71 R5.1 R4.2
NetR6_2: R6.2 R8.2 U4.19 | length 253.3
  Top Layer w10: R8.2 R6.2 1635,2780 1642.95,2787.95 U4.19
NetR24_1: R24.1 U2.53 | length 235.1
  Top Layer w10: U2.53 2563.15,2106.85 2605,2065 R24.1
NetR34_1: R34.1 U2.52 | length 358.2
  Top Layer w10: R34.1 2470,1975 2543.46,2048.46 U2.52
NetR35_1: R35.1 U2.51 | length 499
  Top Layer w10: R35.1 2435,1775 2435,1995 2523.78,2083.78 U2.51
PWM_1: R18.1 TP4.1 U2.40 | length 1622
  Top Layer w10: R18.1 1500,3110 TP4.1 1650,3050 2160,3050 2205,3005 2205,2710 2180,2685 v1(2180,2635) ; v1(2335,2460) 2349.37,2445.63 U2.40
  Bottom Layer w10: v1(2180,2635) 2180,2605 2235,2550 2259.23,2550 2302.85,2506.39 2302.85,2492.15 v1(2335,2460)
PWM_2: R22.1 TP7.1 U2.39 | length 1110.5
  Top Layer w10: R22.1 1945,3110 TP7.1 2160,3105 2230,3035 2230,2685 v1(2245,2670) ; v1(2335,2515) 2384.68,2465.32 U2.39
  Bottom Layer w10: v1(2245,2670) 2258,2670 2293,2635 2293,2622.81 2335,2580.81 v1(2335,2515)
PWM_3: R26.1 TP9.1 U2.38 | length 869.1
  Top Layer w10: v1(2325,2640) 2250,2715 2250,3030 TP9.1 2395,3175 R26.1 ; v1@2390,2510 2415,2485 U2.38
  Bottom Layer w10: v1(2325,2640) 2385,2580 v1(2385,2515)
PWM_4: R30.1 TP11.1 U2.25 | length 955.1
  Top Layer w10: U2.25 2523.78,2856.22 2465,2915 2380,2915 2350,2945 2350,3040 2425,3115 TP11.1 2845,3150 R30.1
PWM_5: R19.1 TP5.1 U2.24 | length 1222
  Top Layer w10: U2.24 2543.46,2871.54 2450,2965 2450,3040 2470,3060 2840,3060 2895,3115 TP5.1 3295,3150 R19.1
PWM_6: R23.1 TP8.1 U2.7 | length 1325.2
  Top Layer w10: U2.7 2878.11,2896.89 2850,2925 2850,3040 2890,3080 3230,3080 3265,3045 3300,3045 3390,3135 3590,3135 3620,3105 TP8.1 R23.1
PWM_7: R27.1 TP10.1 U2.6 | length 1077.1
  Top Layer w10: U2.6 2897.8,2917.2 2870,2945 2870,3030 2900,3060 3220,3060 3255,3025 3385,3025 TP10.1 3415,2950 3520,2845 R27.1
PWM_8: R31.1 TP12.1 U2.5 | length 1515.5
  Top Layer w10: U2.5 2917.48,2932.52 2895,2955 2895,3025 2910,3040 3215,3040 3250,3005 3330,3005 3530,2805 3530,2590 3470,2530 TP12.1 R31.1
RESET*: C2.2 J1.2 U2.30 | length 511.9
  Top Layer w10: v1(2425,2880) 2400,2880 2390,2890 2360,2890 C2.2 2390,2790 2390,2660 2407.52,2642.48 U2.30
  Bottom Layer w10: J1.2 2425,2965 v1(2425,2880)
RXD0: R39.2 U2.2 | length 198.2
  Top Layer w10: U2.2 2976.54,2821.54 3015,2860 3070,2860 R39.2
RXD_EXP: R17.1 U2.63 | length 144.3
  Top Layer w10: U2.63 2760,2100 R17.1
RXD_LED: LD2.K U4.22 | length 512.3
  Top Layer w10: LD2.K 1755,2375 1755,2455 1825,2525 1825,2700 1813.82,2711.18 U4.22
RXD_USB: R9.2 U2.45 U4.1 | length 728.9
  Top Layer w10: U4.1 2025,2529.45 R9.2 2075,2350 2360,2350 2362.8,2347.2 U2.45
SCK: J1.3 U2.20 | length 566.8
  Top Layer w10: J1.3 2550,3040 2725,3040 2750,3015 2750,2965 2622.2,2837.2 U2.20
TEMP_ADC: C4.2 R5.2 TP17.1 U2.97 | length 356.7
  Top Layer w10: U2.97 3182.17,2662.17 ; TP17.1 3209.33,2635 3182.17,2662.17 ; R5.2 C4.2 3182.17,2662.17
TEST1: TP1.1 U2.91 | length 248.6
  Top Layer w10: U2.91 3165.94,2544.06 3180,2530 TP1.1
TEST2: TP2.1 U2.76 | length 209.2
  Top Layer w10: U2.76 3141.22,2248.78 3205,2185 TP2.1
TXD0: R40.2 U2.3 | length 141
  Top Layer w10: U2.3 2956.85,2826.85 R40.2
TXD_EXP: R16.1 U2.64 | length 239.8
  Top Layer w10: U2.64 2779.68,2120.32 2800,2100 2815,2100 2830,2085 2830,2020 R16.1
TXD_LED: LD1.K U4.23 | length 389.2
  Top Layer w10: LD1.K 1710,2480 1730,2500 1770,2500 1805,2535 1805,2670 1790,2685 1735.59,2685 U4.23
TXD_USB: R11.2 U2.46 U4.5 | length 986.1
  Top Layer w10: U4.5 1925,2660 1910,2645 1910,2525 1980,2455 1980,2299.92 2009.92,2270 2065,2270 R11.2 2230,2300 2257.52,2327.52 U2.46
USB_DM: U4.16 USB2.2 | length 841.9
  Top Layer w10: USB2.2 1100,2711.57 1100,2795 1115,2810 1400,2810 1475,2885 1665,2885 1685.28,2864.72 U4.16
USB_DP: U4.15 USB2.3 | length 1108.5
  Top Layer w10: USB2.3 1224.41,2600 1120,2600 1080,2640 1080,2805 1105,2830 1375,2830 1450,2905 1675,2905 1689.68,2890.32 U4.15
USB_VCC: R6.1 R7.1 R10.1 U4.20 USB2.1 | length 1586.7
  Top Layer w10: USB2.1 1205,2705 1420,2705 R6.1 ; U4.20 1647.36,2762.36 1630,2745 1530,2745 R6.1 ; R7.1 R10.1 1885,2285 1665,2285 1660,2290 1660,2505 1495,2670 R6.1
pads on no net: U1.1 U1.2 U1.3 U2.1 U2.4 U2.8 U2.9 U2.12 U2.13 U2.14 U2.15 U2.16 U2.17 U2.18 U2.23 U2.26 U2.27 U2.28 U2.29 U2.35 U2.36 U2.37 U2.41 U2.42 U2.43 U2.44 U2.54 U2.55 U2.56 U2.57 U2.58 U2.59 U2.60 U2.65 U2.66 U2.67 U2.68 U2.69 U2.70 U2.71 U2.72 U2.73 U2.74 U2.75 U2.77 U2.78 U2.79 U2.83 U2.84 U2.85 U2.86 U2.87 U2.88 U2.89 U2.90 U2.92 U2.93 U2.94 U2.95 U3.ADJ U4.2 U4.3 U4.6 U4.8 U4.9 U4.10 U4.11 U4.12 U4.13 U4.14 U4.24 U4.27 U4.28
copper on no net:
  other v1: 3240,1870

## Polygon pours and split planes (outlines as drawn)
MOTORRAIL on Top Layer "+12V_MOTOR" (solid, remove dead copper, pour order 5): 3890,1935 3890,2040 3930,2080 4085,2080 4160,2155 4160,3340 4060,3340 4060,3785 1590,3785 1590,4100 4475,4100 4475,1935
+5 on Top Layer "+5" (solid, remove dead copper, pour order 1001): 3035.59,2760 3035,2760.59 2484.41,2760.59 2484.41,2209.41 3035.59,2209.41
GND on Top Layer "GND" (solid, remove dead copper, pour order 1003): 985,4095 4460,4095 4460,995 985,995
GND on Bottom Layer "GND" (solid, remove dead copper, pour order 1002): 4475,1000 4475,4100 1000,4100 1000,1000

## Keep-outs
Top Layer:
  lines w10: 1400,4075 1400,3650 1445,3650 ; 3855,2080 3855,1780 4125,1780
Keep-Out Layer:
  the board outline again, w10

## Other copper
Top Layer:
  rectangle net MOTORRAIL: 3885,1935 4230,2245

## Silkscreen, mask and mechanical layers (free items; w line width, h text height)
Top Overlay:
  lines w10: 1000,3050.51 1315,3050.51 1330,3050.51 1330,3285.51 1330,3745.51 1000,3745.51 ; 1605,1900 2165,1900 ; 3390,1000 3390,1330 3900,1330 4135,1330 4135,1315 4135,1000
  text "+" at 1785,3580 h60
  text "+" at 2235,3580 h60
  text "+" at 2685,3580 h60
  text "+" at 3135,3580 h60
  text "+" at 3585,3580 h60
  text "+" at 4035,3580 h60
  text "-" at 1420,3575 h60
  text "-" at 1870,3575 h60
  text "-" at 2320,3575 h60
  text "-" at 2770,3575 h60
  text "-" at 3220,3575 h60
  text "-" at 3670,3575 h60
  text "GND" at 1345,3475 h60 r270
  text "GND" at 1345,3055 h60
  text "1" at 2195,2950 h75
  text "-" at 3950,2920 h60 r270
  text "+" at 3955,2555 h60 r270
  text "-" at 3950,2470 h60 r270
  text "+" at 3955,2105 h60 r270
  text "Address" at 1700,1920 h60
  text "1" at 1600,1790 h60
  text "2" at 1735,1790 h60
  text "4" at 1885,1785 h60
  text "8" at 2035,1785 h60
  text "-" at 3935,1730 h75
  text "PWM" at 1650,1690 h60
  text "MOTOR" at 1650,1610 h60
  text "CONTROL" at 1650,1520 h60
  text "T. Burns" at 1650,1420 h60
  text "+5" at 2215,1380 h75
  text "+" at 3880,1360 h75
  text "2014" at 1655,1325 h60
  text "VIN" at 3685,1255 h60
  text "GND" at 1670,1040 h60
  text "VIN" at 3690,1015 h60
Board Outline:
  lines w10: 1015,1000 1000,1000 ; 1000,1000 1000,4100 4100,4100 4475,4100 4475,1000 1000,1000
Mechanical 3:
  lines w10: 1000,3657.48 1000,3854.33